# Altium PCB LEDMATRIX.PcbDoc
Units mil, origin at the board's own origin, x right, y up, seen from the top; angles counter-clockwise.
Board outline 1200 x 1470 mil, 2 copper layers (Top Layer, Bottom Layer); 8 components, 17 nets, 34 pads, 0 vias.
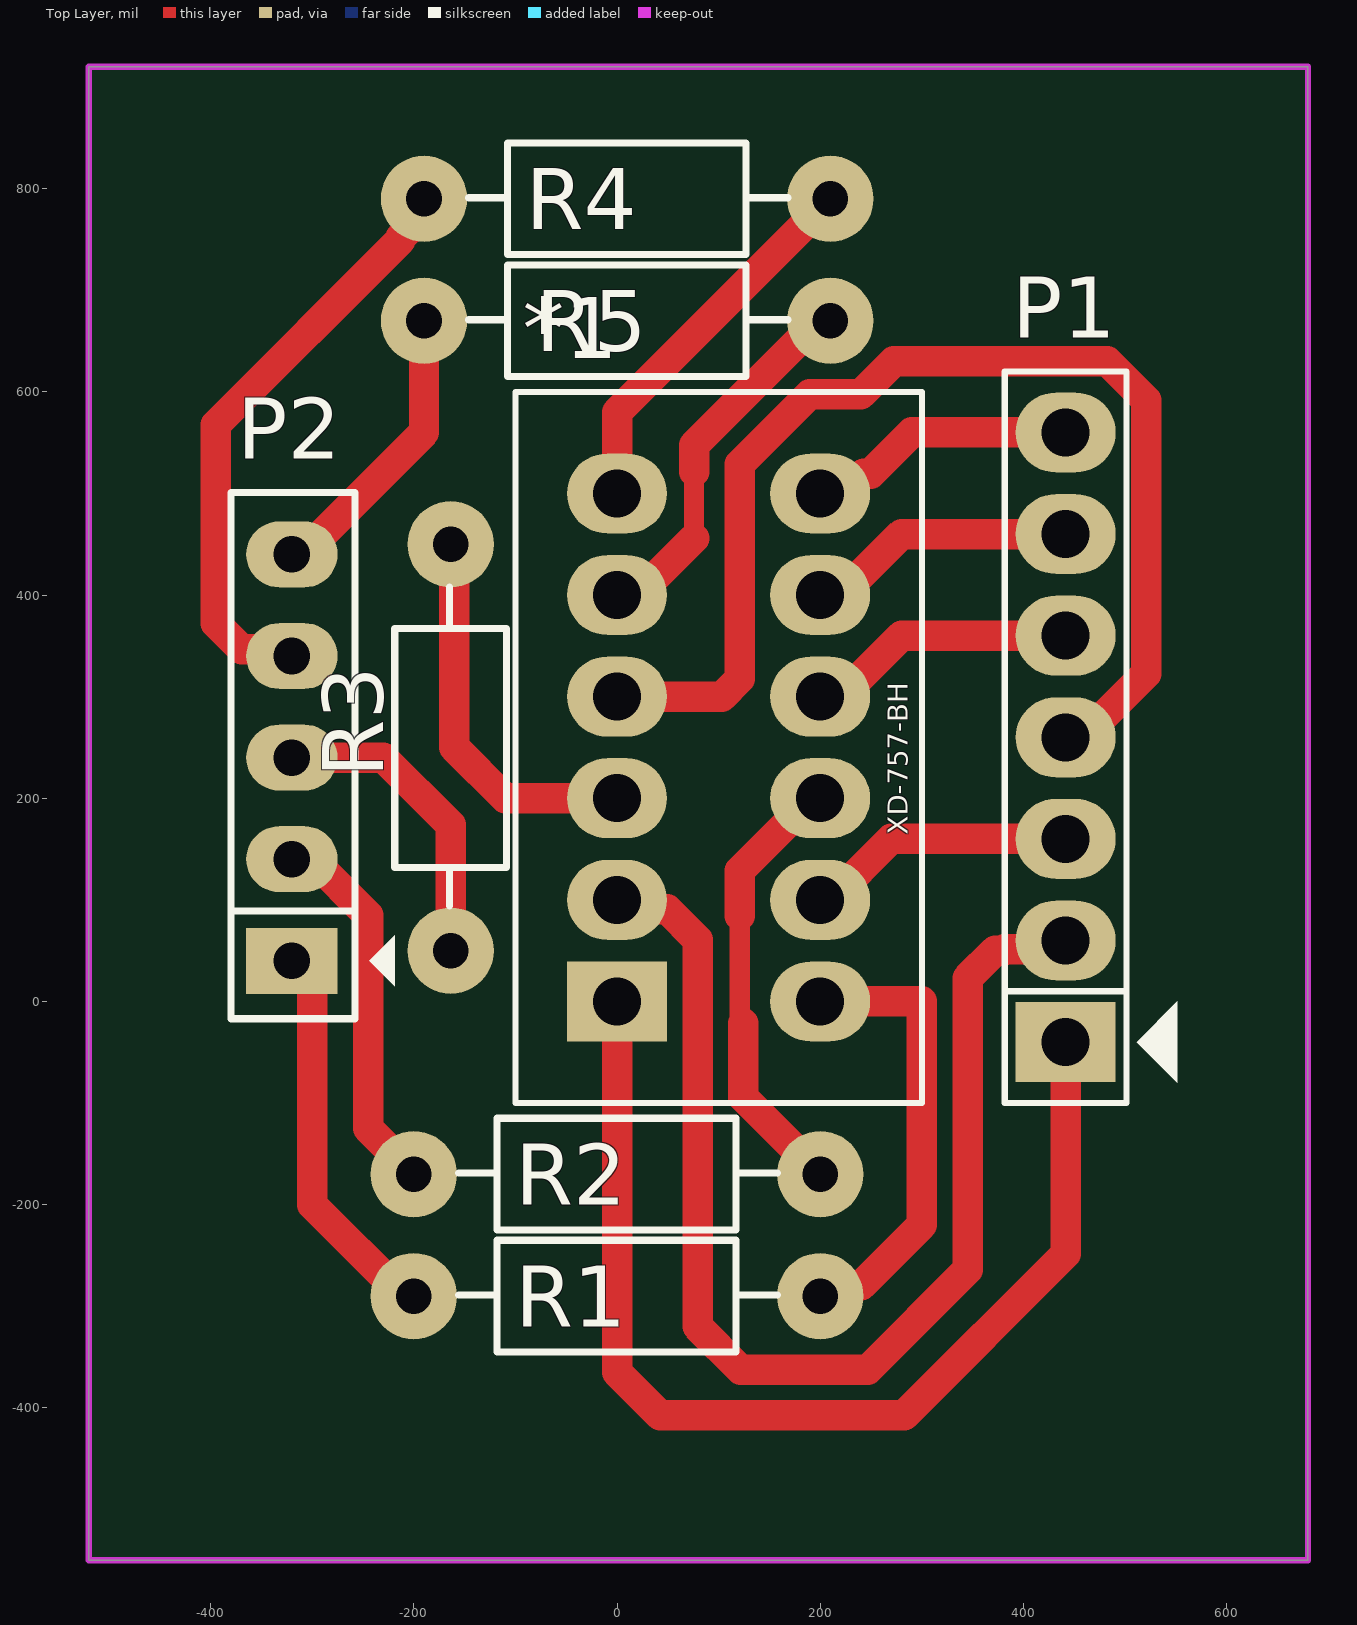
[diagram p0: Top Layer view]
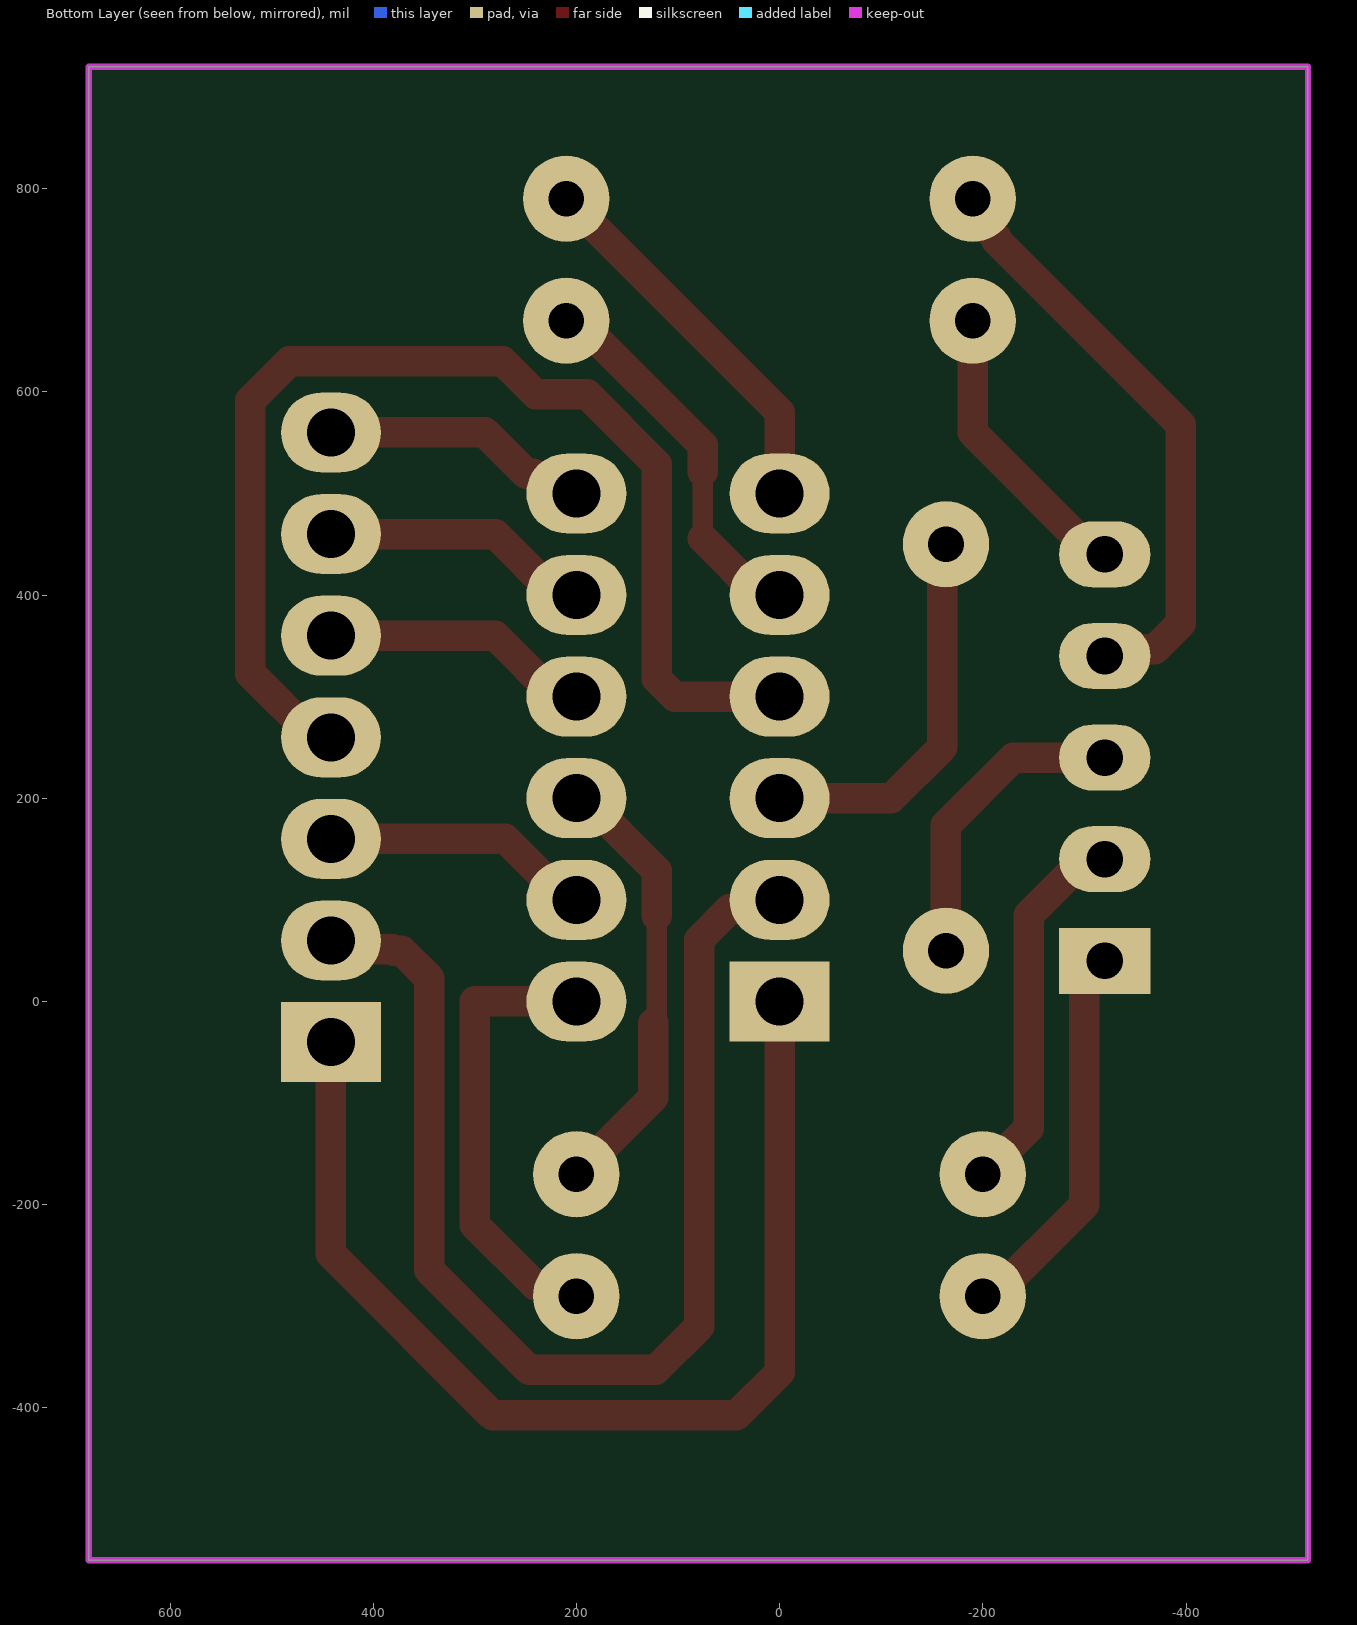
[diagram p1: Bottom Layer view, seen from below]
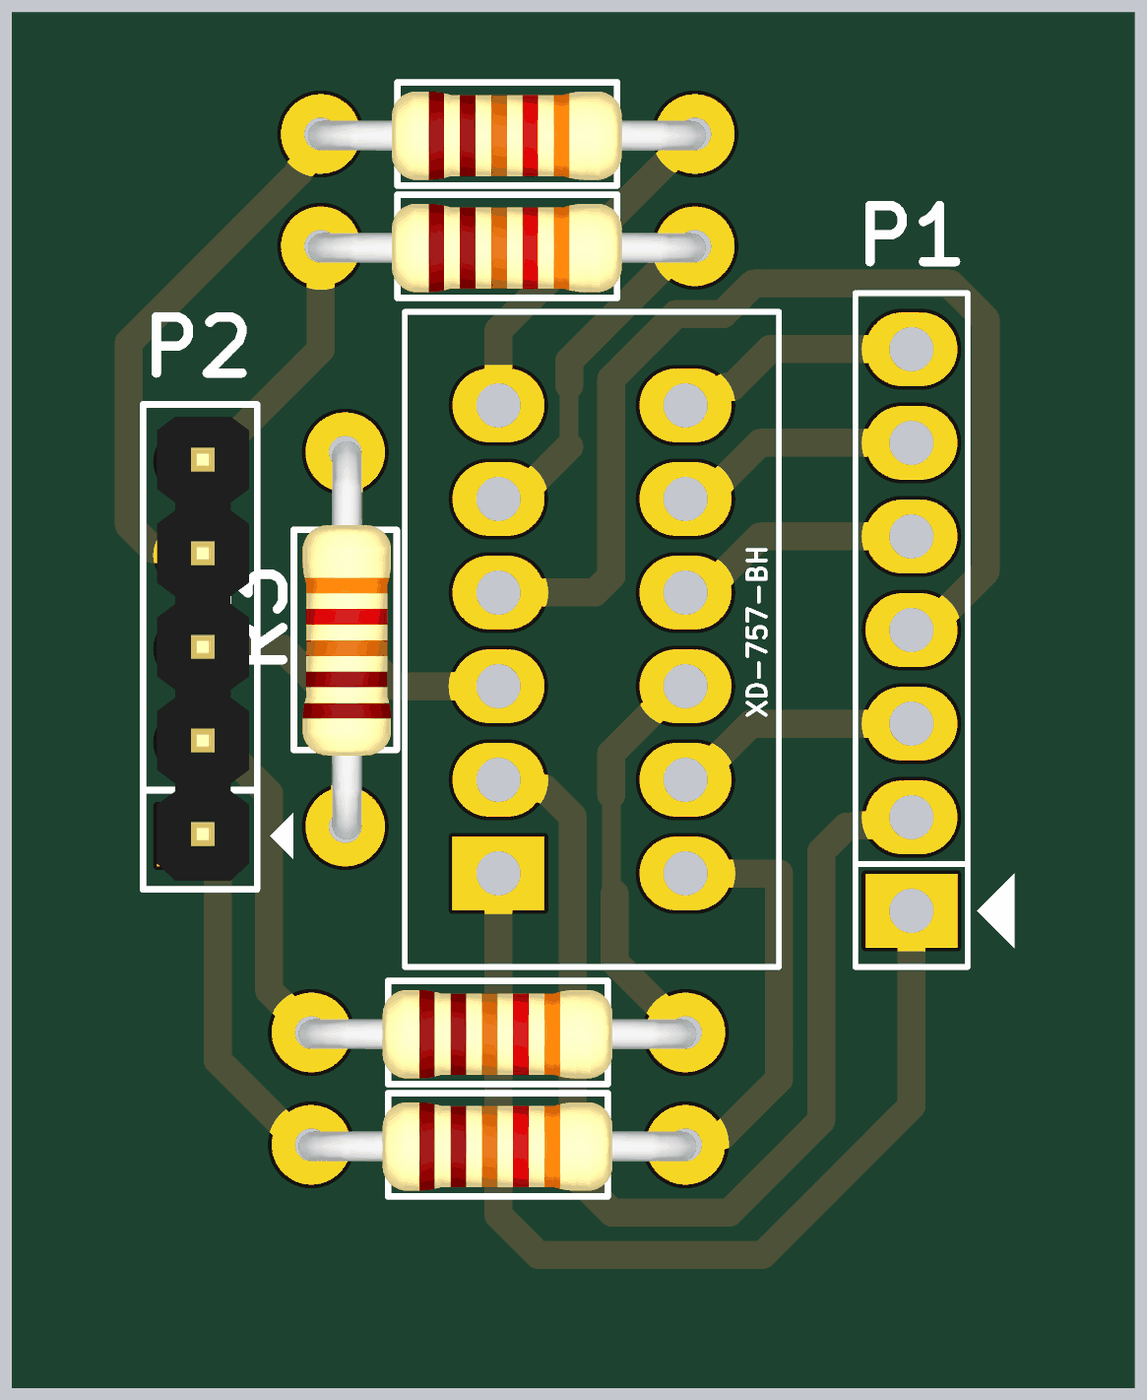
[diagram p2: 3D render of the assembled board from above, using the file's embedded part models]

## Layer stack, top to bottom
Top Solder: solder mask 0.4, Solder Resist, Dk 3.5
Top Layer: signal copper 1.4
Dielectric 1: dielectric 12.6, FR-4, Dk 4.8
Bottom Layer: signal copper 1.4
Bottom Solder: solder mask 0.4, Solder Resist, Dk 3.5

## Board outline
-520,-550 -520,920 680,920 680,-550

## Design rules (kind name [scope] priority, off if disabled: settings)
Clearance [All] p1: gap=15 ignorepadtopadclearanceinfootprint=FALSE
ComponentClearance [All] p1: gap=0 collisioncheckmode=3 verticalgap=100000 showdistances=FALSE
PolygonConnect [All] p1: connectstyle=Relief reliefconductorwidth=10 reliefentries=4 polygonreliefangle="90 Angle" airgapwidth=10
RoutingVias [All] p1: holewidth=39.37 width=66.93 viastyle="Through Hole" minholewidth=39.37 minwidth=66.93 maxholewidth=39.37 maxwidth=66.93
ShortCircuit [All] p1: allowed=TRUE
SilkToSilkClearance [All] p1 off: silktosilkclearance=10
SilkToSolderMaskClearance [IsPad] p1 off: minsilkscreentomaskgap=10 clearancetoexposedcopper=TRUE
SolderMaskExpansion [All] p1: expansion=4 istentingtop=FALSE
Width [All] p1: maxlimit=50 minlimit=20 preferedwidth=30
26 further rules are at their usual default settings.

## Components (designator, comment, footprint, x,y, rotation, side; value= is the part's Value field where it differs from the comment)
*1 "Component_1" PCBComponent_1 0,0 r0 top
P1 "Header 7" "header 7" 441.59,260 r90 top
P2 "Header 5" JP5 -320.04,40 r90 top
R1 "RESISTOR" "RES 1/2W" 200,-290 r180 top value=1K
R2 "RESISTOR" "RES 1/2W" 200,-170 r180 top value=1K
R3 "RESISTOR" "RES 1/2W" -163.75,450 r270 top value=1K
R4 "RESISTOR" "RES 1/2W" 210,790 r180 top value=1K
R5 "RESISTOR" "RES 1/2W" 210,670 r180 top value=1K

## Footprints (in the part's own frame and the unit in brackets; to place one, negate y for a bottom-side part, rotate by r counter-clockwise, add the part's x,y. Pads: shape width x height; smd on the part's side, far side on the other; paste and mask are expansions set on the pad)
"header 7" [mm]
  rect 2x2.5 hole 1.2: 1(-7.62,0)
  oval 2x2.5 hole 1.2: 2(-5.08,0) 3(-2.54,0) 4(0,0) 5(2.54,0) 6(5.08,0) 7(7.62,0)
  silkscreen extent -9.14,-2.79 9.14,1.52
JP5 [mil] "JP5"
  rect 65x90 hole 36: 1(0,0)
  oval 65x90 hole 36: 2(100,0) 3(200,0) 4(300,0) 5(400,0)
  silkscreen extent -57,-101 461,60, body extent -48,-53 448,45, height 323
PCBComponent_1 [mm]
  rect 2.5x2 hole 1.2: 1(0,0)
  oval 2.5x2 hole 1.2: 2(0,2.54) 3(5.08,2.54) 4(0,7.62) 5(5.08,7.62) 6(5.08,10.16) 7(5.08,12.7) 8(5.08,0) 9(5.08,5.08) 10(0,5.08) 11(0,12.7) 12(0,10.16)
  silkscreen extent -2.54,-2.54 7.62,15.24
"RES 1/2W" [mil] "R 1/2W, 2 pin, 300mil"
  round 85 hole 35: 1(0,0) 2(400,0)
  silkscreen extent 42,-55 356,55, body extent -12,-45 414,49, height 91

## Part data
P1: "Header, 7-Pin", LatestRevisionDate=17-Jul-2002, LatestRevisionNote="Re-released for DXP Platform.", Publisher="Altium Limited"
P2: "Header, 5-Pin", LatestRevisionDate=17-Jul-2002, LatestRevisionNote="Re-released for DXP Platform.", Publisher="Altium Limited"
R1 R2 R3 R4 R5: "Resistor"

## Nets (pads, with @x,y where several pads share a name; then routed paths per layer and width w, separated by ;. In a path a pad name is that pad's centre, name@x,y a point inside that pad or via, vN(x,y) a via of type N, cw(c..) or ccw(c..) an arc to the next point about the centre after c; other vN are vias at no path point)
Net*1_1: *1.1 P1.1 | length 1098.4
  Top Layer w30: *1.1 0,-364.85 42.65,-407.5 282.5,-407.5 441.59,-248.41 P1.1
Net*1_2: *1.2 P1.2 | length 1199.3
  Top Layer w30: *1.2 9.33,90.67 49.33,90.67 79.21,60.79 79.21,-319.85 121.86,-362.5 246.64,-362.5 345,-264.14 345,22.98 372.02,50 380,50 381.22,51.22 432.81,51.22 P1.2
Net*1_3: *1.3 P1.3 | length 266.4
  Top Layer w30: *1.3 210,100 270,160 P1.3
Net*1_4: *1.4 P1.4 | length 1171.2
  Top Layer w30: *1.4 103.21,300 120.79,317.57 120.79,528.73 189.55,597.5 240.03,597.5 272.53,630 482.43,630 520.81,591.62 520.81,322.75 458.06,260 P1.4
Net*1_5: *1.5 P1.5 | length 266.4
  Top Layer w30: *1.5 220,300 280,360 P1.5
Net*1_6: *1.6 P1.6 | length 266.4
  Top Layer w30: *1.6 220,400 280,460 P1.6
Net*1_7: *1.7 P1.7 | length 266.4
  Top Layer w30: *1.7 223.03,500 242.61,519.58 249.58,519.58 290,560 P1.7
Net*1_8: *1.8 R1.1 | length 449
  Top Layer w30: R1.1 210.52,-279.48 240.52,-279.48 300,-220 300,0 *1.8
Net*1_9: *1.9 R2.1 | length 440.3
  Top Layer w20: 120.79,84.21 120.79,-18.1 124.21,-21.53
  Top Layer w30: 120.79,84.21 120.79,128.73 192.05,200 *1.9 ; 124.21,-21.53 124.21,-94.21 R2.1
Net*1_10: *1.10 R3.1 | length 382.3
  Top Layer w30: R3.1 -160,446.25 -160,250 -110,200 *1.10
Net*1_11: *1.11 R4.1 | length 377
  Top Layer w30: *1.11 0,580 R4.1
Net*1_12: *1.12 R5.1 | length 398.3
  Top Layer w20: 75.79,455.79 75.79,521.53
  Top Layer w30: *1.12@-7.95,400 *1.12 20,400 75.79,455.79 ; 75.79,521.53 75.79,547.37 198.41,670 R5.1 R5.1@210,684.88
NetP2_1: P2.1 R1.2 | length 387.1
  Top Layer w30: P2.1 -317.5,40 -300,22.5 -300,-200 -210,-290 R1.2
NetP2_2: P2.2 R2.2 | length 371.4
  Top Layer w30: P2.2 -300.11,140 -245.04,84.93 -245.04,-124.93 R2.2
NetP2_3: P2.3 R3.2 | length 307.5
  Top Layer w30: P2.3 -230,240 -163.75,173.75 R3.2
NetP2_4: P2.4 R4.2 | length 591
  Top Layer w30: P2.4 -326.73,346.7 -369.41,346.7 -395.04,372.32 -395.04,567.49 -213.14,749.39 -213.14,751.98 -190,775.12 R4.2
NetP2_5: P2.5 R5.2 | length 289.7
  Top Layer w30: P2.5 -310,440 -190,560 R5.2

## Keep-outs
Keep-Out Layer:
  the board outline again, w6

## Text inside footprints (layer, text, board x,y; h text height)
*1: Top Overlay "XD-757-BH" at 286.06,163.94 h19.68 r90